# Altium PCB DustCollectorSwitch.PcbDoc
Units mil, origin at the board's own origin, x right, y up, seen from the top; angles counter-clockwise.
Board outline 2100 x 2705.2 mil, 2 copper layers (Top Layer, Bottom Layer); 46 components, 39 nets, 121 pads, 14 vias.
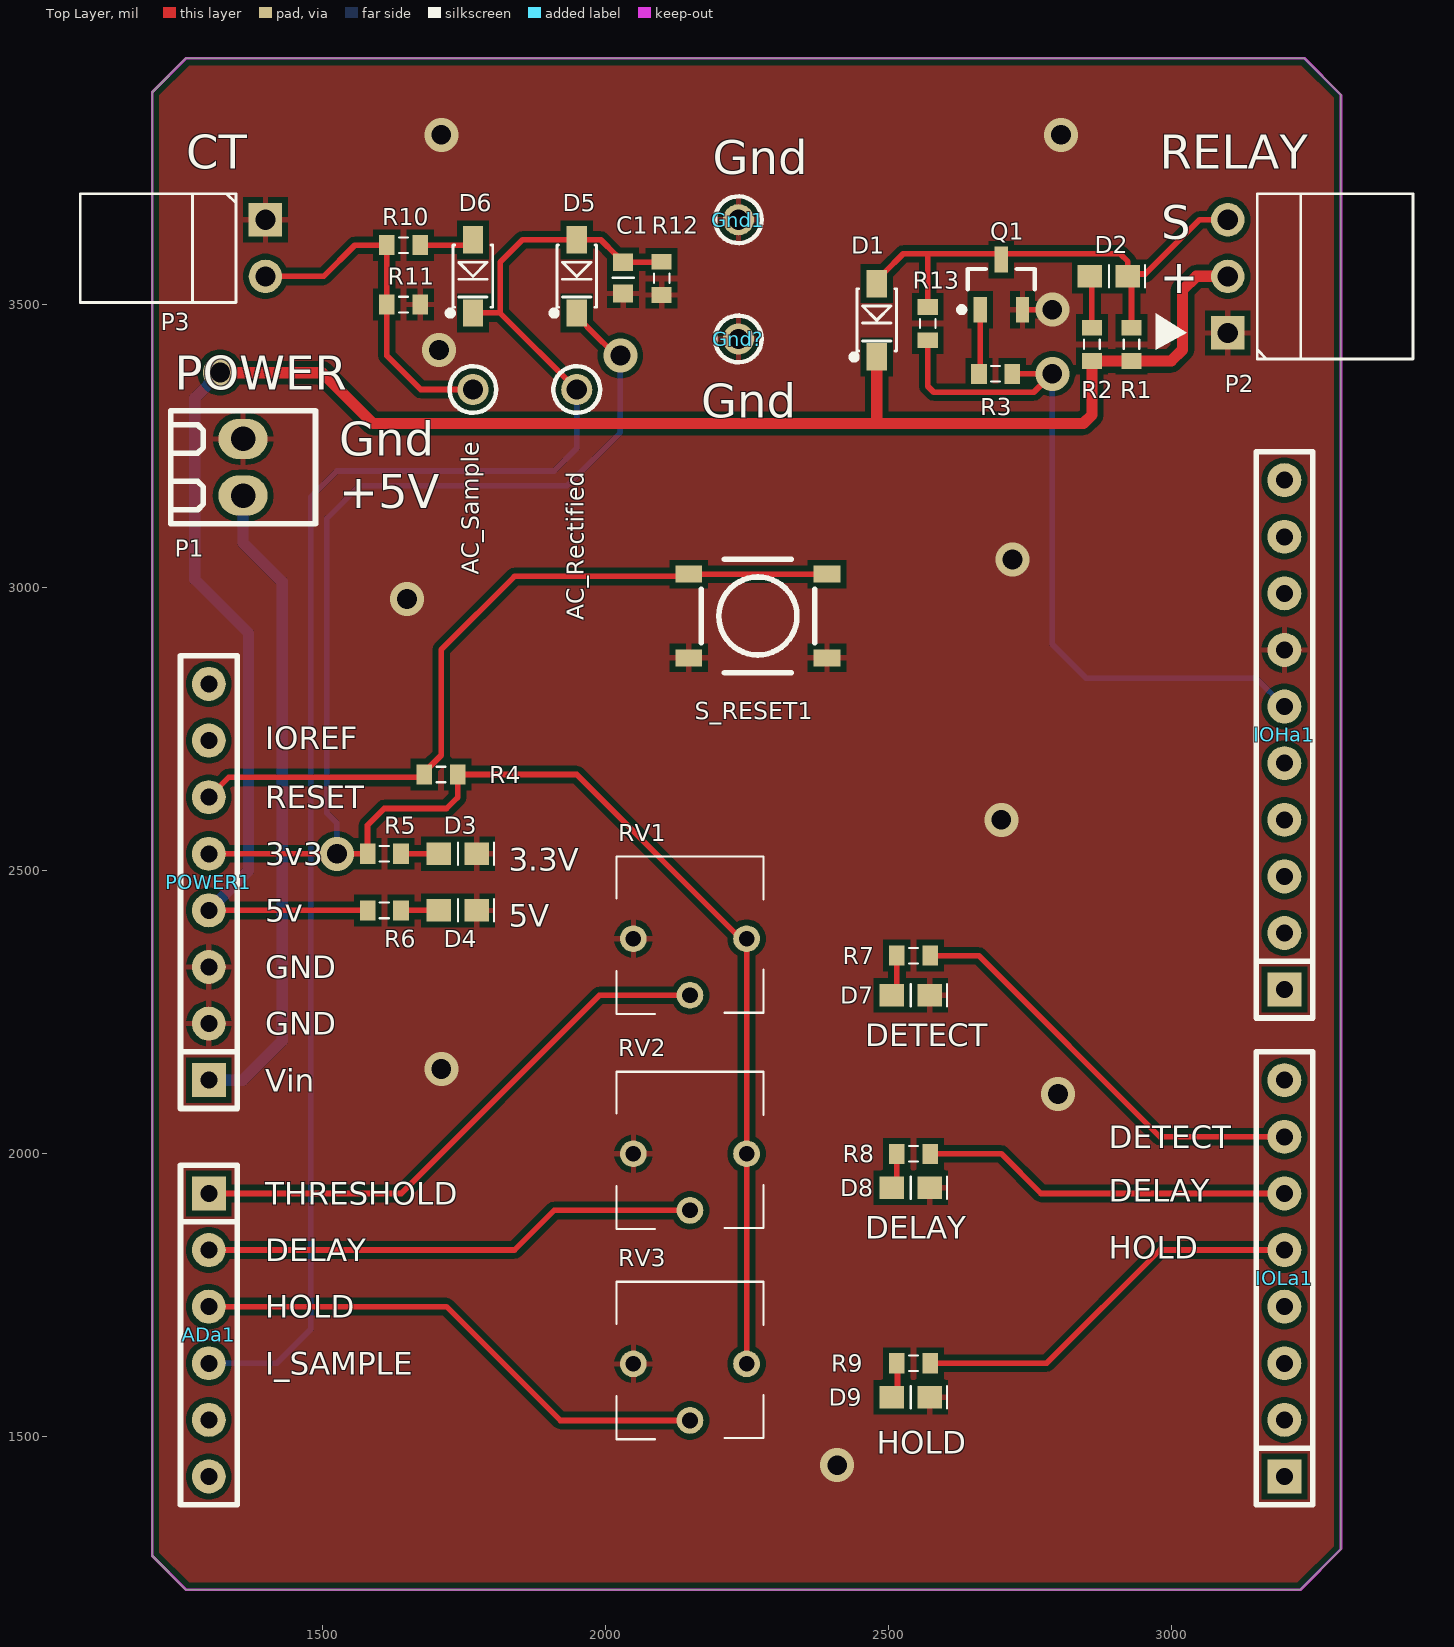
[diagram p0: Top Layer view]
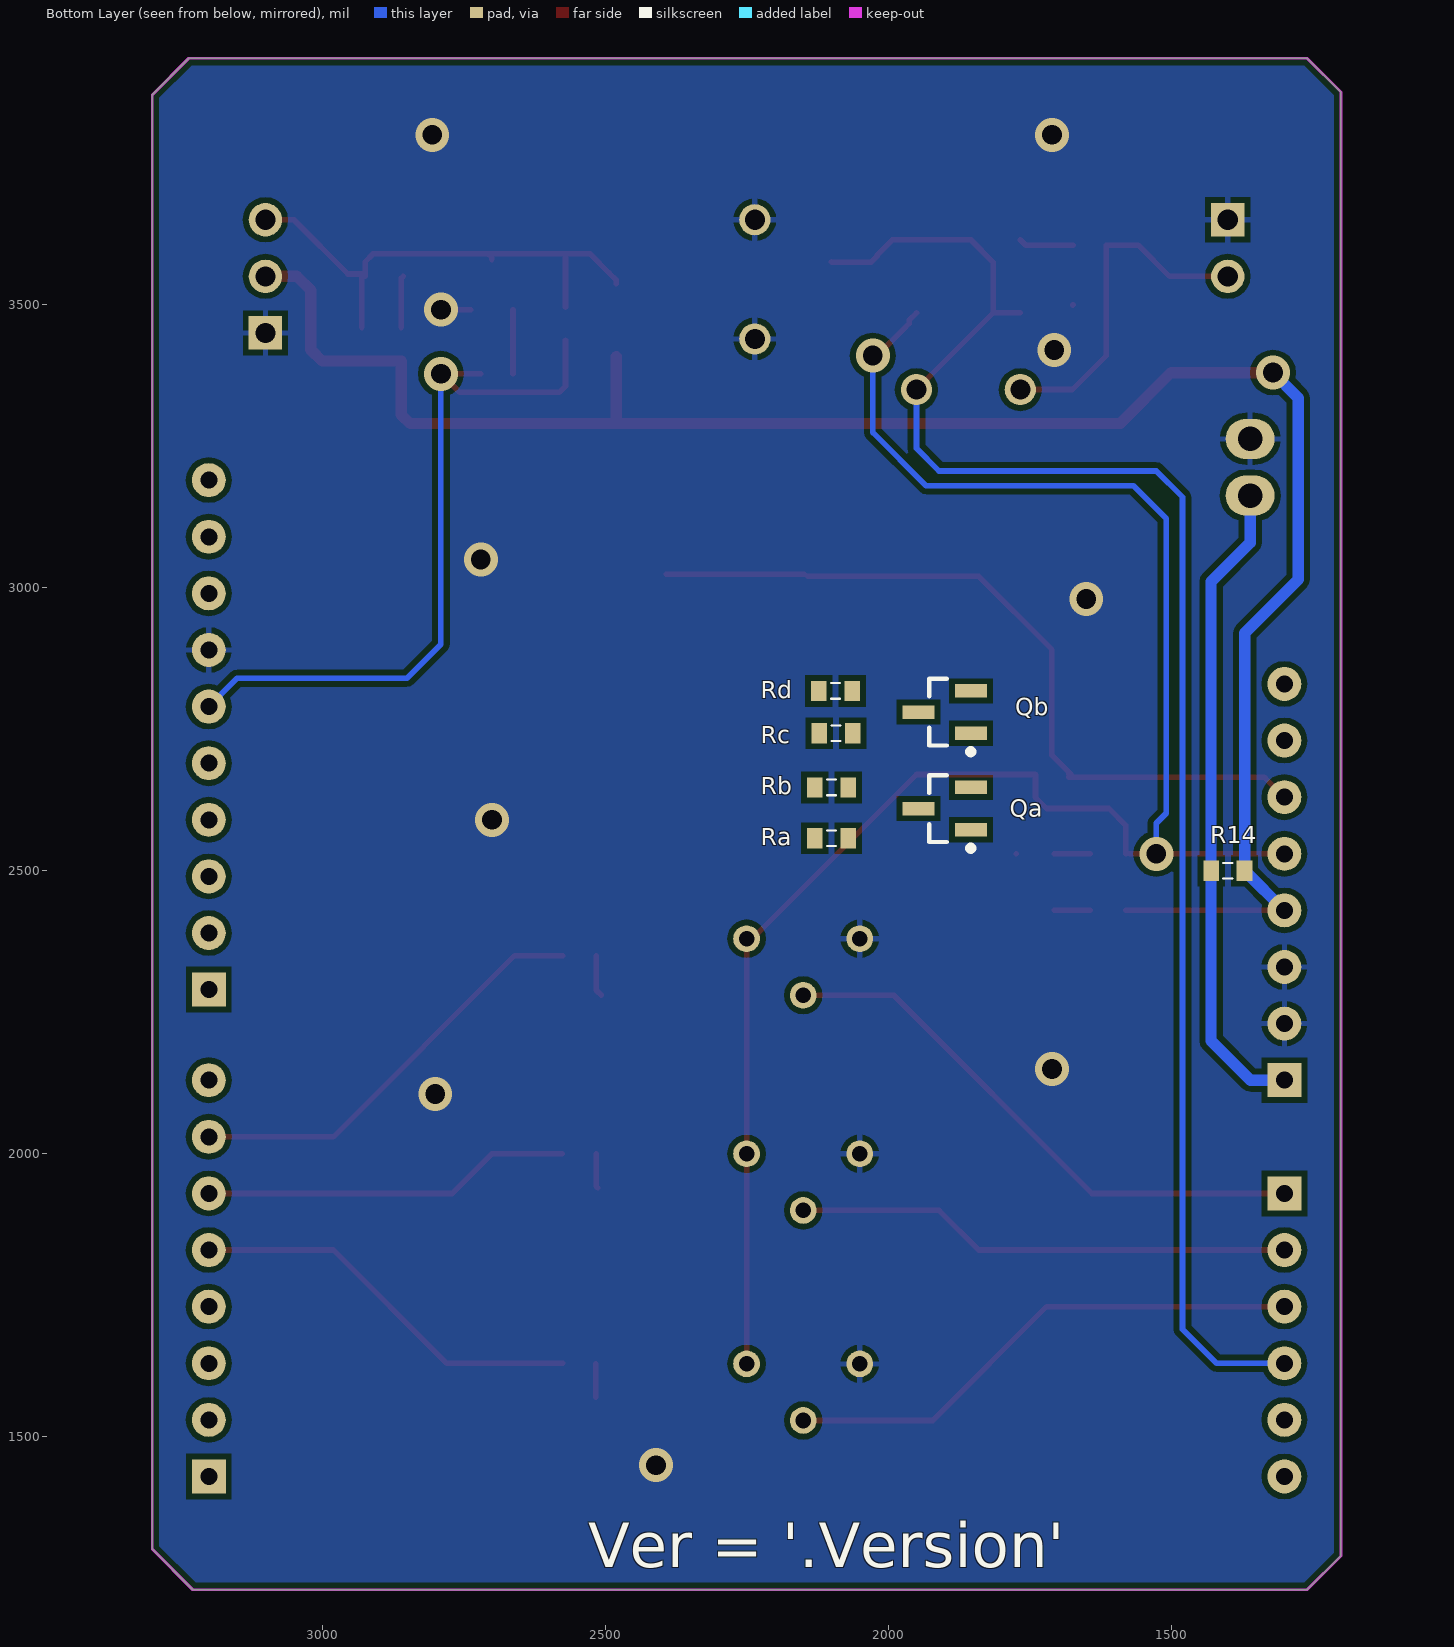
[diagram p1: Bottom Layer view, seen from below]
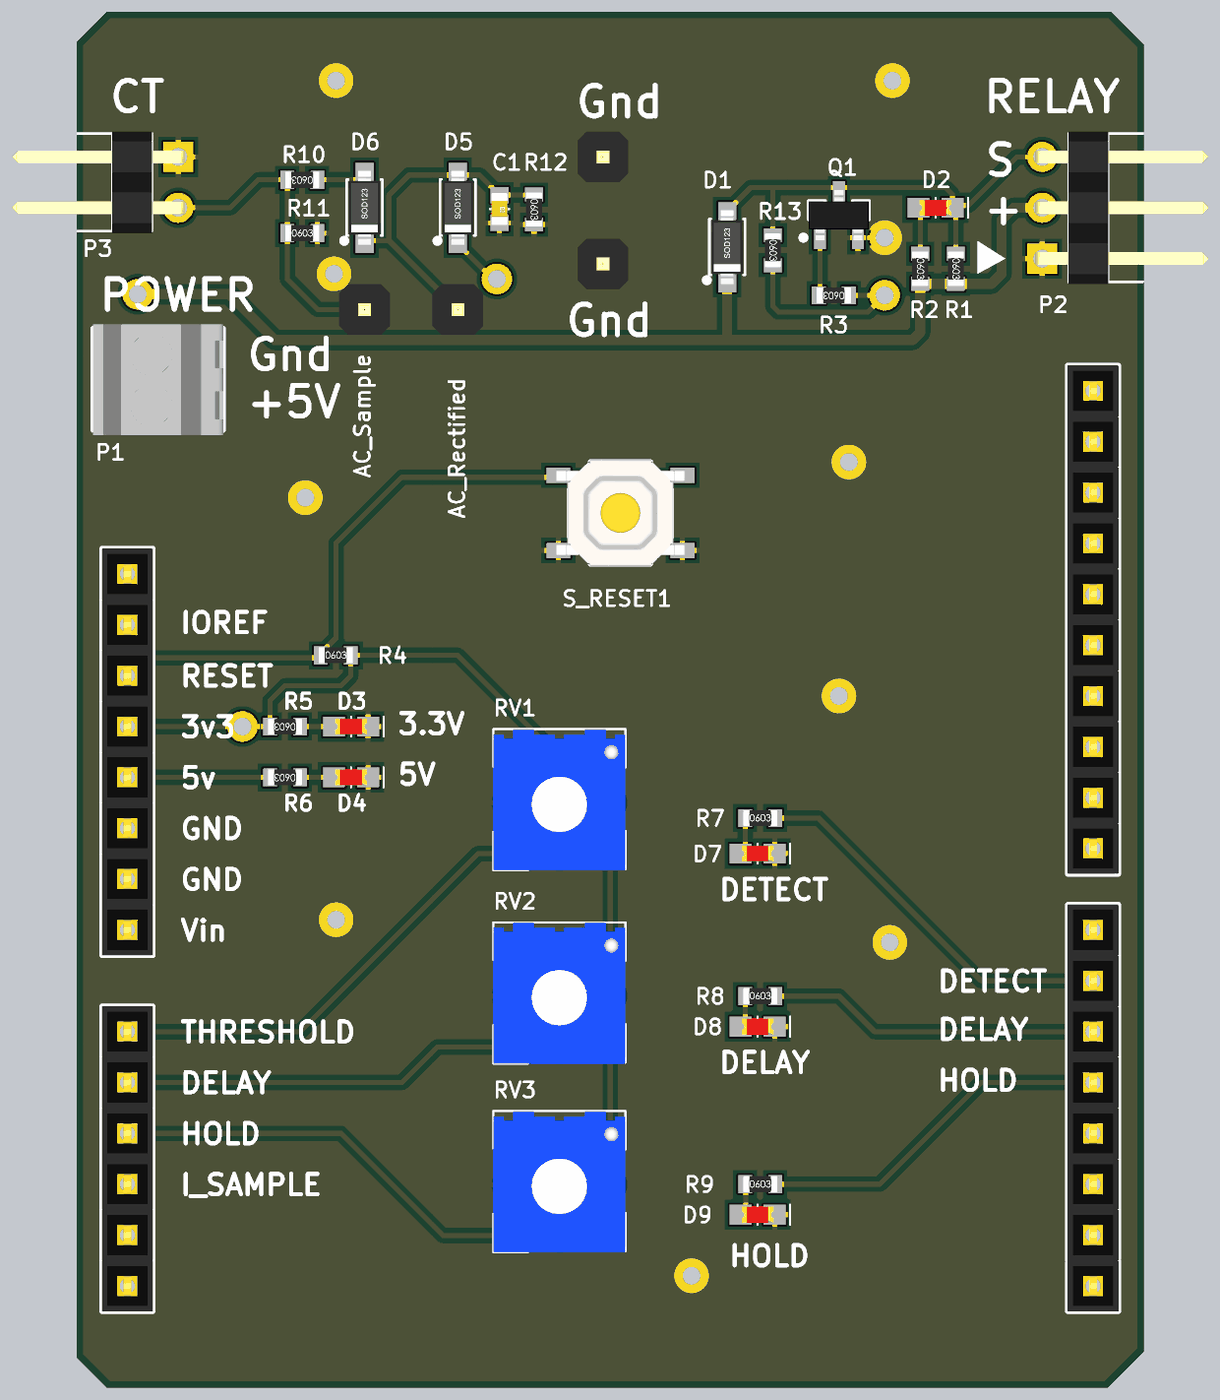
[diagram p2: 3D render of the assembled board from above, using the file's embedded part models]
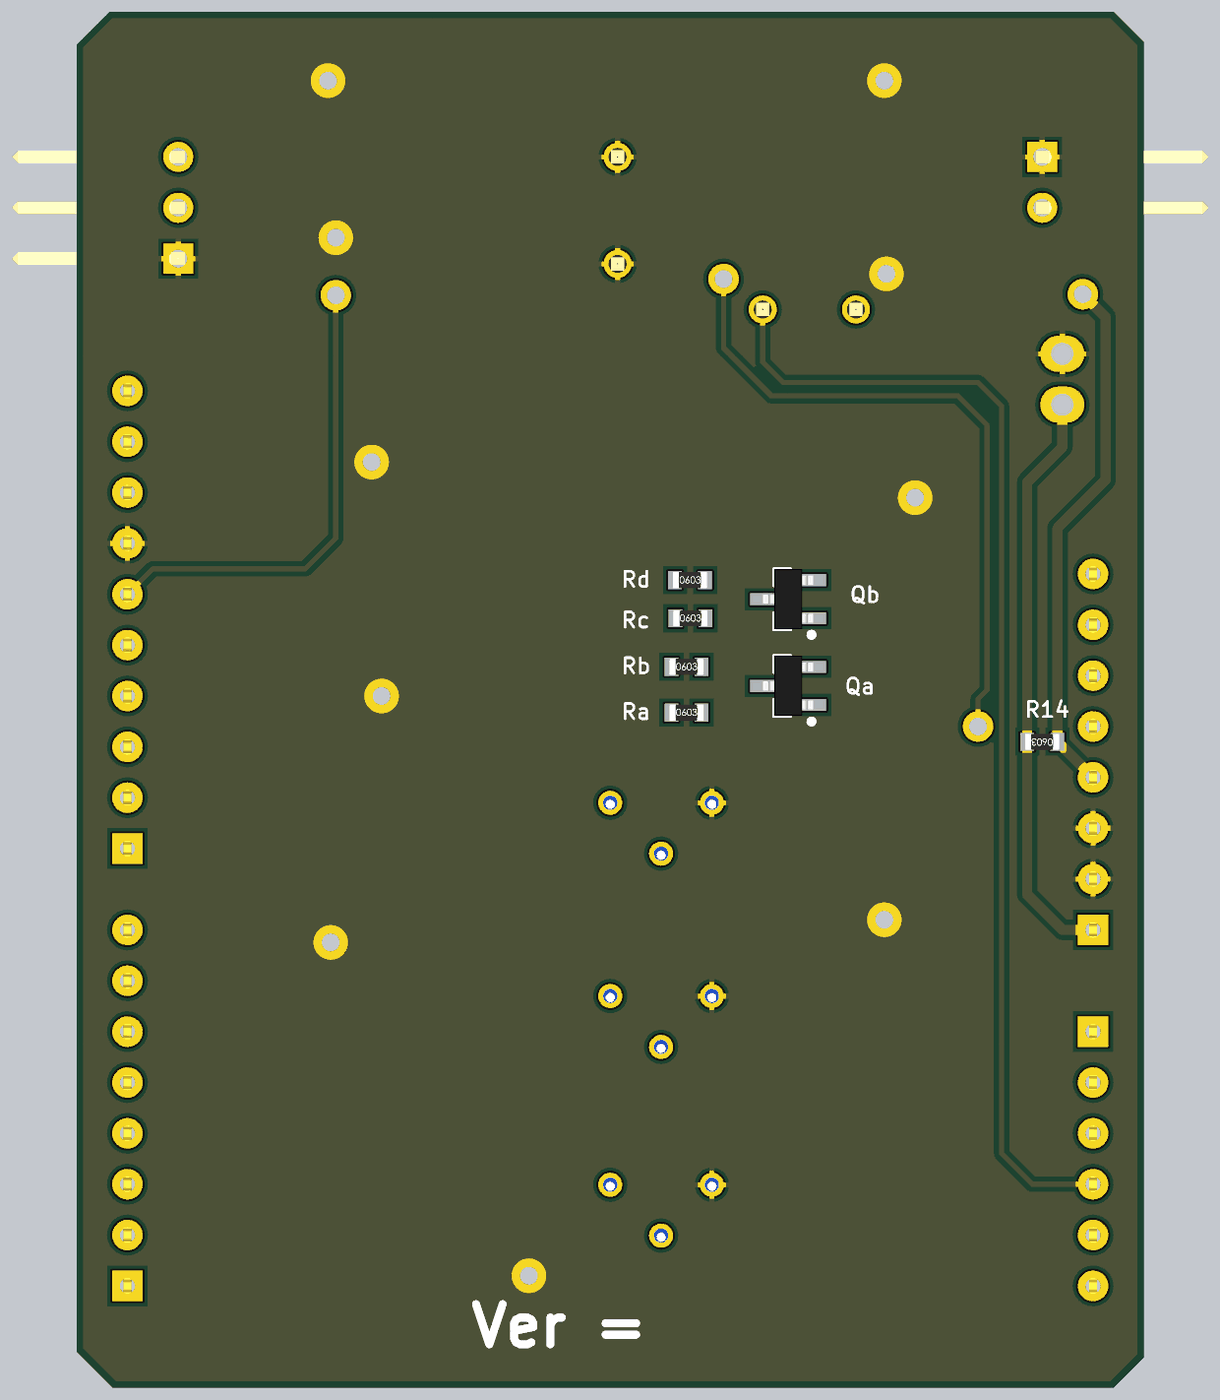
[diagram p3: 3D render of the assembled board from below, using the file's embedded part models]

## Layer stack, top to bottom
Top Solder: solder mask 0.4, Solder Resist, Dk 3.5
Top Layer: signal copper 1.4
Dielectric1: dielectric 12.6, FR-4, Dk 4.8
Bottom Layer: signal copper 1.4
Bottom Solder: solder mask 0.4, Solder Resist, Dk 3.5

## Board outline
1259.84,1230 1200,1289.84 1200,3875.35 1259.84,3935.2 3235.43,3935.2 3300,3870.63 3300,1301.65 3228.35,1230

## Design rules (kind name [scope] priority, off if disabled: settings)
Clearance [All] p1: gap=10 ignorepadtopadclearanceinfootprint=FALSE except(0: Arc-Hole Track-Hole SMDPad-Hole THPad-Hole Via-Hole Fill-Hole Poly-Hole Region-Hole Text-Hole)
MinimumSolderMaskSliver [All] p1 off: minsoldermaskwidth=10
PolygonConnect PolygonConnect_Via [IsPolygon vs IsVia] p1: connectstyle=Direct reliefconductorwidth=10 reliefentries=4 polygonreliefangle="90 Angle" airgapwidth=10
PolygonConnect [All] p2: connectstyle=Relief reliefconductorwidth=10 reliefentries=4 polygonreliefangle="90 Angle" airgapwidth=10
RoomDefinition DustCollectorSwitch [InComponentClass('DustCollectorSwitch')] p1: confinementstyle=ConfineIn formatcopy=TRUE lockcomponents=FALSE outline 1000,1205 3500,1205 3500,3989 1000,3989
RoutingVias [All] p1: holewidth=28 width=50 viastyle="Through Hole" minholewidth=28 minwidth=50 maxholewidth=28 maxwidth=50
SilkToSolderMaskClearance SilkscreenOverComponentPads [IsPad] p1 off: minsilkscreentomaskgap=10 clearancetoexposedcopper=TRUE
SolderMaskExpansion [All] p1: expansion=4 istentingtop=FALSE
Width [All] p1: maxlimit=20 minlimit=10 preferedwidth=10
28 further rules are at their usual default settings.

## Components (designator, comment, footprint, x,y, rotation, side; value= is the part's Value field where it differs from the comment)
AC_Rectified "Vdd" "PCBPIN - 0.9mm" 1950,3350 r90 top
AC_Sample "Vdd" "PCBPIN - 0.9mm" 1766.54,3350 r90 top
ADa1 "AD" "Header 6x1 8.5mm" 1300,1930 r270 top locked
C1 "100nF" CCNP1608-0603_N 2031.99,3547.44 r270 top
D1 "1N4148W" SOD-123 2480,3472.52 r90 top
D2 "LED Red" LED1608-0603-RED 2890,3550 r180 top
D3 "LED Red" LED1608-0603-RED 1740,2530 r180 top
D4 "LED Red" LED1608-0603-RED 1740,2430 r180 top
D5 "1N4148W" SOD-123 1950,3550 r90 top
D6 "1N4148W" SOD-123 1766.54,3550 r90 top
D7 "LED Red" LED1608-0603-RED 2540,2280 r180 top
D8 "LED Red" LED1608-0603-RED 2540,1940 r180 top
D9 "LED Red" LED1608-0603-RED 2540,1570 r180 top
Gnd1 "Gnd" "PCBPIN - 0.9mm" 2235.51,3650 r0 top
Gnd? "Gnd" "PCBPIN - 0.9mm" 2235.51,3439.53 r0 top
IOHa1 "IOH" "Header 10x1 8.5mm" 3200,2290 r90 top locked
IOLa1 "IOL" "Header 8x1 8.5mm" 3200,1430 r90 top locked
P1 "Terminal2_2.54mm" TYCO-282834-2 1360.47,3212.8 r270 top
P2 "Header, 3-Pin, Right Angle" HDR1X3H 3100,3450 r90 top
P3 "Header, 2-Pin, Right Angle" HDR1X2H 1400,3650 r270 top
POWER1 "POWER_UNO" "Header 8x1 8.5mm" 1300,2130 r90 top locked
Q1 "MMBT3904LT1G" SOT23_N 2700,3535.43 r270 top
Qa "DNP" SOT23_M 1900,2609.83 r180 bottom
Qb "DNP" SOT23_M 1900,2780.31 r180 bottom
R1 "1K" CR1608-0603_N 2930,3430 r270 top
R2 "1K" CR1608-0603_N 2860,3430 r270 top
R3 "1K" CR1608-0603_N 2690,3377.87 r180 top
R4 "1K" CR1608-0603_N 1710,2670 r0 top
R5 "1K" CR1608-0603_N 1610,2530 r180 top
R6 "1K" CR1608-0603_N 1610,2430 r180 top
R7 "1K" CR1608-0603_N 2545,2350 r0 top
R8 "1K" CR1608-0603_N 2545,2000 r0 top
R9 "1K" CR1608-0603_N 2545,1630 r0 top
R10 "470 R" CR1608-0603_N 1643.98,3605 r180 top
R11 "470 R" CR1608-0603_N 1643.98,3500 r0 top
R12 "10K" CR1608-0603_N 2100,3546.54 r270 top
R13 "0R" CR1608-0603_N 2570,3466.42 r270 top
R14 "0R" CR1608-0603_N 1400,2500 r0 bottom
Ra "DNP" CR1608-0603_N 2100,2557.4 r180 bottom
Rb "DNP" CR1608-0603_N 2100,2647.23 r180 bottom
Rc "DNP" CR1608-0603_N 2092.28,2742.91 r180 bottom
Rd "DNP" CR1608-0603_N 2093.04,2817.71 r180 bottom
RV1 "1K" "BOURNS 3362P" 2150,2380 r270 top
RV2 "1K" "BOURNS 3362P" 2150,2000 r270 top
RV3 "1K" "BOURNS 3362P" 2150,1628.94 r270 top
S_RESET1 "SMD-SW-4_5.1x5.1x3.5_M" SMD-SW-4_5.1x5.1x3.5_M 2270,2950 r0 top

## Footprints (in the part's own frame and the unit in brackets; to place one, negate y for a bottom-side part, rotate by r counter-clockwise, add the part's x,y. Pads: shape width x height; smd on the part's side, far side on the other; paste and mask are expansions set on the pad)
"BOURNS 3362P" [mm] "Small horizontal single-turn trim pot"
  round 1.2 hole 0.7: CCW(0,-2.54) CW(0,2.54) W(2.54,0)
  silkscreen extent -3.68,-3.3 3.38,3.3, body extent -3.68,-3.3 3.38,3.3, height 4.7
CCNP1608-0603_N [mm]
  rect 0.8x0.9 smd: 1(-0.7,0) 2(0.7,0)
  silkscreen extent 0,-0.48 0,0.48, body extent -0.8,-0.4 0.8,0.4, height 0.3
CR1608-0603_N [mm]
  rect 0.7x0.9 smd: 1(-0.75,0) 2(0.75,0)
  silkscreen extent -0.2,-0.35 0.2,0.35, body extent -0.85,-0.4 0.85,0.4, height 0.56
HDR1X2H [mm] "Header; 2 Position; Right Angle"
  rect 1.5x1.5 hole 0.9: 1(0,0)
  round 1.5 hole 0.9: 2(2.54,0)
  silkscreen extent -1.17,-8.31 3.71,-1.32, body extent -1.27,-8.3 3.81,0.33, height 2.54
HDR1X3H [mm] "Header; 3 Position; Right Angle"
  rect 1.5x1.5 hole 0.9: 1(0,0)
  round 1.5 hole 0.9: 2(2.54,0) 3(5.08,0)
  silkscreen extent -1.17,-8.31 6.25,3.24, body extent -1.27,-8.3 6.35,0.33, height 2.54
"Header 6x1 8.5mm" [mil] "Stackable 6 pin header"
  rect 60x60 hole 30: 1(0,0)
  round 60 hole 30: 2(100,0) 3(200,0) 4(300,0) 5(400,0) 6(500,0)
  silkscreen extent -50,-50 550,50, body extent -50,-50 550,50, height 335
"Header 8x1 8.5mm" [mil] "Stackable 8 pin header"
  rect 60x60 hole 30: 1(0,0)
  round 60 hole 30: 2(100,0) 3(200,0) 4(300,0) 5(400,0) 6(500,0) 7(600,0) 8(700,0)
  silkscreen extent -50,-50 750,50, body extent -50,-50 750,50, height 335
"Header 10x1 8.5mm" [mil] "Stackable 10 pin header"
  rect 60x60 hole 30: 1(0,0)
  round 60 hole 30: 2(100,0) 3(200,0) 4(300,0) 5(400,0) 6(500,0) 7(600,0) 8(700,0) 9(800,0) 10(900,0)
  silkscreen extent -50,-50 950,50, body extent -50,-50 950,50, height 335
LED1608-0603-RED [mm] "SMT-LED 0603"
  rect 1.1x1 smd: A(0.85,0) K(-0.85,0)
  silkscreen extent -1.62,-0.5 0,0.5, body extent -0.8,-0.4 0.8,0.4, height 0.7
"PCBPIN - 0.9mm" [mm]
  round 1.4 hole 0.9: 1(0,0)
  silkscreen extent -1.05,-1.05 1.05,1.05, body extent -1.27,-1.27 1.27,1.27, height 6
SMD-SW-4_5.1x5.1x3.5_M [mm] "Miniature SMD PCB Push Button - C318886"
  rect 1.2x0.762 smd: 1(3.1,-1.875) 1b(-3.1,-1.875) 2(3.1,1.875) 2b(-3.1,1.875)
  silkscreen extent -2.55,-2.55 2.55,2.55, body extent -3.2,-2.65 3.2,2.65, height 3.5
SOD-123 [mm] "SOD-123; 2 Leads; Body 2.7 x 1.6 mm, (LxW)"
  rect 1.22x0.91 smd: A(1.64,0) K(-1.64,0)
  silkscreen extent -1.78,-0.89 1.41,1.14, body extent -1.85,-0.77 1.85,0.78, height 1.35
SOT23_M [mm] "SOT23, 3-Leads, Body 2.9x1.3mm, Pitch 0.95mm, Lead Span 2.3mm - IPC Low Density"
  rect 1.45x0.6 smd: 1(1.175,-0.95) 2(1.175,0.95) 3(-1.175,0)
  silkscreen extent -0.7,-1.9 1.29,1.5, body extent -1.25,-1.5 1.25,1.5, height 1.05
SOT23_N [mm] "SOT23, 3-Leads, Body 2.9x1.3mm, Pitch 0.95mm, Lead Span 2.3mm - IPC Medium Density"
  rect 1.15x0.6 smd: 1(1.125,-0.95) 2(1.125,0.95) 3(-1.125,0)
  silkscreen extent -0.7,-1.9 1.25,1.5, body extent -1.25,-1.5 1.25,1.5, height 1.05
TYCO-282834-2 [mm] "Terminal Block (2.54mm)"
  oval 1.8x2.2 hole 1.1: 1(-1.27,0) 2(1.27,0)
  silkscreen extent -2.54,-3.25 2.54,3.25, body extent -2.74,-3.25 2.8,3.25, height 10

## Part data
AC_Rectified AC_Sample Gnd1 Gnd?: library part TP, "Test Point"
ADa1: Supplier Part Number 1=2699089, Supplier 1=Arrow, Supplier 2=Digi-Key, Supplier 3=Arrow, Supplier 4=Arrow, Supplier Part Number 2=SAM1198-06-ND, Supplier Part Number 3=2699088, Supplier Part Number 4=2699075
C1: library part Cap_CCNP_0603_100nF, "Capacitor non-polar SMT 0603", LCSC=C14663, Manufacturer="Generic Components", Class=Passive, Published=08/06/2000, Publisher="Altium Hobart Technology Centre", SubClass=Capacitor
D1 D5 D6: "Diode - Switching 75V 150mA 1.25V @ 150mA 4ns, SOD-123", LCSC=C81598, Class=Discrete, SubClass="Diode - Switching"
D2 D3 D4 D7 D8 D9: library part LED-0603-Red, "LED 0603 Red", LCSC=C2286, Manufacturer="Generic Components", Class I=Optoelectronic, Class II=LED, Farnell PN=1581239, Published=8-Jun-2000, Publisher="Altium Limited", Revision="July-2002: Re-released for DXP Platform."
IOHa1: Supplier Part Number 1=2698803S4475693N1004, Supplier 1=Arrow, Supplier 2=Digi-Key, Supplier 3=Arrow, Supplier Part Number 2=SAM1198-10-ND, Supplier Part Number 3=2698789
IOLa1 POWER1: Supplier Part Number 1=SAM1198-08-ND, Supplier 1=Digi-Key, Supplier 2=Arrow, Supplier 3=Arrow, Supplier 4=Arrow, Supplier Part Number 2=2698939, Supplier Part Number 3=2698940, Supplier Part Number 4=2698925
P1: "TE 282834-2 Terminal Block, 2.54 mm, 2 Ways, 30 AWG, 16 AWG, Screw", Farnell PN=2112482
P2: library part "Header 1x3H", LatestRevisionDate=17-Jul-2002, LatestRevisionNote="Re-released for DXP Platform.", Publisher="Altium Limited"
P3: library part "Header 1x2H", LatestRevisionDate=17-Jul-2002, LatestRevisionNote="Re-released for DXP Platform.", Publisher="Altium Limited"
Q1: "General Purpose Transistor, NPN Silicon, 3-Pin SOT-23, Pb-Free, Tape and Reel", LCSC=C20526, Manufacturer="On Semiconductor", ComponentLink1Description="Manufacturer URL", ComponentLink1URL=http://www.onsemi.com/, ComponentLink2Description=Datasheet, ComponentLink2URL=http://www.onsemi.cn/pub_link/Collateral/MMBT3904LT1-D.PDF, ComponentLink3Description="Package Specification", ComponentLink3URL=http://www.onsemi.cn/pub_link/Collateral/318-08.PDF, DatasheetVersion="Rev. 12", fT Min (MHz)=300, IC Continuous (A)=0.2, Mounting Technology="Surface Mount", PackageDescription="3-Pin Small Outline Transistor, Body 2.92 x 1.3 mm, Pitch 0.95 mm", PackageReference=SOT-23-3-318-08, PackageVersion="Rev. AP, 11/2009", Packing="Tape and Reel", PartNumber=MMBT3904LT1G, Polarity=NPN, RoHS=TRUE
Qa Qb: library part MMBT3904LT1G, "SOT23", ComponentLink1Description="Manufacturer URL", ComponentLink1URL=http://www.onsemi.com/, ComponentLink2Description=Datasheet, ComponentLink2URL=http://www.onsemi.cn/pub_link/Collateral/MMBT3904LT1-D.PDF, ComponentLink3Description="Package Specification", ComponentLink3URL=http://www.onsemi.cn/pub_link/Collateral/318-08.PDF
R1 R2 R3 R4 R5 R6 R7 R8 R9 R13 R14: library part Res_CR0603, "Resistor SMT 0603", LCSC=C21190, Manufacturer="Generic Components", Class=Passive, Published=08/06/2000, Publisher="Altium Hobart Technology Centre", SubClass=Resistor
R10 R11 R12: library part Res_CR0603, "Resistor SMT 0603", LCSC=C23179, Manufacturer="Generic Components", Class=Passive, Published=08/06/2000, Publisher="Altium Hobart Technology Centre", SubClass=Resistor
Ra Rb Rc Rd: library part Res_CR0603, "Resistor SMT 0603", Manufacturer="Generic Components", Class=Passive, Published=08/06/2000, Publisher="Altium Hobart Technology Centre", SubClass=Resistor
RV1 RV2 RV3: library part POT_BOURNS_3362P, "Trim Pot - single turn horizontal", Farnell PN="9354298 or similar"
S_RESET1: library part SW_PB-TS, "Tactile Switch SPST 5.10mm X 5.10mm / (1.5mm=C318884) / (2.0mm=C318888) / (3.5mm=C318886)", LCSC=C318886, Revision=1.0

## Via types
v1: diameter 60, hole 35, Top Layer to Bottom Layer, 14 vias

## Nets (pads, with @x,y where several pads share a name; then routed paths per layer and width w, separated by ;. In a path a pad name is that pad's centre, name@x,y a point inside that pad or via, vN(x,y) a via of type N, cw(c..) or ccw(c..) an arc to the next point about the centre after c; other vN are vias at no path point)
3V3: D5.K POWER1.5 R4.2 R5.2 RV1.CW RV2.CW RV3.CW | length 3347.1
  Top Layer w10: POWER1.5 v1(1526.29,2530) R5.2@1573.51,2530 ; R5.2 1580.47,2580.47 1610,2610 1720,2610 1739.53,2629.53 R4.2 1817.4,2670 1950,2670 2250,2370 RV2.CW RV3.CW@2250,1630 ; D5.K 1962.91,3472.52 1962.91,3466.42 1973.59,3455.74 2019.33,3410 v1(2026.99,3410)
  Bottom Layer w10: v1(1526.29,2530) 1526.29,2583.82 1508.64,2601.47 1508.64,3122.24 1566.4,3180 1932.84,3180 2026.99,3274.15 v1(2026.99,3410)
5V: D1.K P2.2 POWER1.4 R1.2 R2.2 R6.2 R14.1 | length 3474.8
  Top Layer w10: POWER1.4 R6.2
  Top Layer w20: v1(1320.2,3380) 1500,3380 1590,3290 2480,3290 2560,3290 2844.71,3290 2860,3305.29 R2.2 R1.2 3000,3400.47 3020,3420.47 3020,3525.73 3044.27,3550 P2.2 ; 2480,3292.52 D1.K
  Bottom Layer w20: POWER1.4 1370,2500 1370,2920 1275.44,3014.56 1275.44,3335.24 v1(1320.2,3380)
AC_Rectified: AC_Rectified.1 ADa1.4 C1.1 D5.A D6.K R12.1 | length 2933.2
  Top Layer w10: D6.K 1814.57,3485.43 ; AC_Rectified.1 1814.57,3485.43 ; R12.1 2098.94,3575 C1.1 2030.03,3575 2019.28,3585.75 2019.28,3587.72 1992.43,3614.57 D5.A 1854.13,3614.57 1814.57,3575 1814.57,3485.43
  Bottom Layer w10: ADa1.4 1420,1630 1480,1690 1480,3160 1526.29,3206.29 1910,3206.29 1950,3246.29 AC_Rectified.1
AC_Sample: AC_Sample.1 P3.2 R10.2 R11.1 | length 609.2
  Top Layer w10: P3.2 1502.8,3550 1557.8,3605 R10.2 R11.1 1614.45,3410 1674.45,3350 AC_Sample.1
AREF: IOHa1.8
Delay: ADa1.2 RV2.W | length 879
  Top Layer w10: ADa1.2 1840,1830 1910,1900 RV2.W
DETECT_LED: IOLa1.7 R7.2 | length 758
  Top Layer w10: R7.2 2660,2350 2980,2030 IOLa1.7
DLY_LED: IOLa1.6 R8.2 | length 652.9
  Top Layer w10: R8.2@2576.06,2000 2700,2000 2770,1930 IOLa1.6
GND: C1.2 D3.K D4.K D7.K D8.K D9.K Gnd1.1 Gnd?.1 IOHa1.7 P1.1 P2.1 P3.1 POWER1.2 POWER1.3 Q1.2 R11.2 R12.2 RV1.CCW RV2.CCW RV3.CCW S_RESET1.1 S_RESET1.1b | length 55.4
  Top Layer w10: POWER1.2 POWER1.2@1301.54,2228.46 ; R11.2 R11.2@1673.98,3499.53 ; Q1.2 v1(2790,3491.14)
  other v1: 2410,1450 2800,2105.44 1710.68,2150 2700,2590 1650,2980 2719.53,3050 1706.54,3420 1710.68,3800 2805.29,3800
HLD_LED: IOLa1.5 R9.2 | length 708.3
  Top Layer w10: R9.2 2780,1630 2980,1830 IOLa1.5
Hold: ADa1.3 RV3.W | length 933.3
  Top Layer w10: ADa1.3 1720,1730 1921.06,1528.94 RV3.W
IOREF: POWER1.7
NetD1_A: D1.A D2.K P2.3 Q1.3 R1.1 R13.1 | length 970.1
  Top Layer w10: D1.A 2480,3543.19 2492.91,3556.1 2526.81,3590 2570,3590 ; R13.1 2570,3590 ; Q1.3 2700,3583.19 2706.81,3590 2762.28,3590 ; R1.1 2930,3550 D2.K 2923.46,3576.06 2909.53,3590 2762.28,3590 ; D2.K@2930,3554.26 2954.26,3554.26 3050,3650 P2.3 ; 2570,3590 2762.28,3590
NetD2_A: D2.A R2.1 | length 91.9
  Top Layer w10: D2.A 2860,3546.54 R2.1
NetD3_A: D3.A R5.1 | length 63.1
  Top Layer w10: R5.1@1643.46,2530 D3.A
NetD4_A: D4.A R6.1 | length 63.1
  Top Layer w10: R6.1@1643.46,2430 D4.A
NetD6_A: D6.A R10.1 | length 97
  Top Layer w10: R10.1 1756.97,3605 D6.A
NetD7_A: D7.A R7.1 | length 73.7
  Top Layer w10: D7.A 2515.47,2288.94 R7.1
NetD8_A: D8.A R8.1 | length 61
  Top Layer w10: D8.A@2513.07,1940 2515.47,1942.4 R8.1
NetD9_A: D9.A R9.1 | length 58.9
  Top Layer w10: D9.A@2516.54,1570 R9.1@2516.54,1628.94
PTA2: IOHa1.2
PTA5: IOLa1.3
PTA12: IOHa1.1
PTB0: ADa1.6
PTB1: ADa1.5
PTB2: IOHa1.10
PTB3: IOHa1.9
PTC2: IOHa1.3
PTC4: IOLa1.8
PTD2: IOHa1.4
PTD3: IOHa1.5
PTD4: IOLa1.4
PTE0: IOLa1.2
PTE1: IOLa1.1
RELAY: Q1.1 R3.2 | length 113.3
  Top Layer w10: R3.2@2662.6,3377.87 Q1.1
RELAY_DRV: IOHa1.6 R3.1 R13.2 | length 1322.9
  Top Layer w10: R13.2 2570,3355.86 2580.7,3345.16 2757.28,3345.16 v1(2790,3377.87) R3.1
  Bottom Layer w10: v1(2790,3377.87) 2790,2900 2850,2840 3150,2840 IOHa1.6
RESET: POWER1.6 R4.1 S_RESET1.2 S_RESET1.2b | length 1364.3
  Top Layer w10: POWER1.6 1335,2665 R4.1@1680.47,2665 ; R4.1@1676.54,2670 R4.1@1681.93,2675.39 ; R4.1 1680.47,2673.94 1710.68,2704.15 1710.68,2890.68 1840,3020 S_RESET1.2b@2141.52,3020 ; S_RESET1.2b S_RESET1.2
Threshold: ADa1.1 RV1.W | length 995
  Top Layer w10: ADa1.1 1640,1930 1990,2280 RV1.W
VIN: P1.2 POWER1.1 R14.2 | length 1150.1
  Bottom Layer w20: POWER1.1 1359.83,2130 1429.53,2199.7 1429.53,3010.47 1360.47,3079.53 P1.2
pads on no net: POWER1.8 Qa.1 Qa.2 Qa.3 Qb.1 Qb.2 Qb.3 Ra.1 Ra.2 Rb.1 Rb.2 Rc.1 Rc.2 Rd.1 Rd.2

## Polygon pours and split planes (outlines as drawn)
GND on Bottom Layer "tga" (solid, remove dead copper, pour order 0): 1000,4030 3500,4030 3500,1130 1000,1130
GND on Top Layer "GND_L01_P001" (solid, remove dead copper, pour order 1): 1200,4000 3300,4000 3300,1230 1200,1230

## Keep-outs
Keep-Out Layer:
  lines w5: 1200,1289.84 1200,3875.35 1259.84,3935.2 3235.43,3935.2 3300,3870.63 3300,1301.65 3228.35,1230 2700,1230 1350,1230 1259.84,1230 1200,1289.84

## Silkscreen, mask and mechanical layers (free items; w line width, h text height)
Top Overlay:
  text "CT" at 1260,3740 h60
  text "RELAY" at 2980,3740 h60
  text "S" at 2982.5,3615.5 h60
  text "+" at 2980,3520 h60
  text "POWER" at 1240,3350 h60
  text "Gnd" at 1530,3232.8 h60
  text "+5V" at 1530,3140 h60
  text "IOREF" at 1400,2715 h40
  text "RESET" at 1400,2610 h40
  text "3v3" at 1400,2510 h40
  text "3.3V" at 1830,2500 h40
  text "5v" at 1400,2410 h40
  text "5V" at 1830,2400.67 h40
  text "GND" at 1400,2310 h40
  text "GND" at 1400,2210 h40
  text "DETECT" at 2460,2190 h40
  text "Vin" at 1400,2110 h40
  text "DETECT" at 2890,2010 h40
  text "DELAY" at 2890,1915 h40
  text "THRESHOLD" at 1400,1910 h40
  text "DELAY" at 2460,1850 h40
  text "HOLD" at 2890,1815 h40
  text "DELAY" at 1400,1810 h40
  text "HOLD" at 1400,1710 h40
  text "I_SAMPLE" at 1400,1610 h40
  text "HOLD" at 2480,1470 h40
Bottom Overlay:
  text "Ver = '.Version'" at 2530,1270 h78.74